# Altium PCB Orchid-Lamp.PcbDoc
Units mm, origin at the board's own origin, x right, y up, seen from the top; angles counter-clockwise.
Board outline 43.8 x 35.3 mm, 2 copper layers (Top Layer, Bottom Layer); 17 components, 20 nets, 100 pads, 0 vias.
Unrouted connection lines stored in the file: 5.
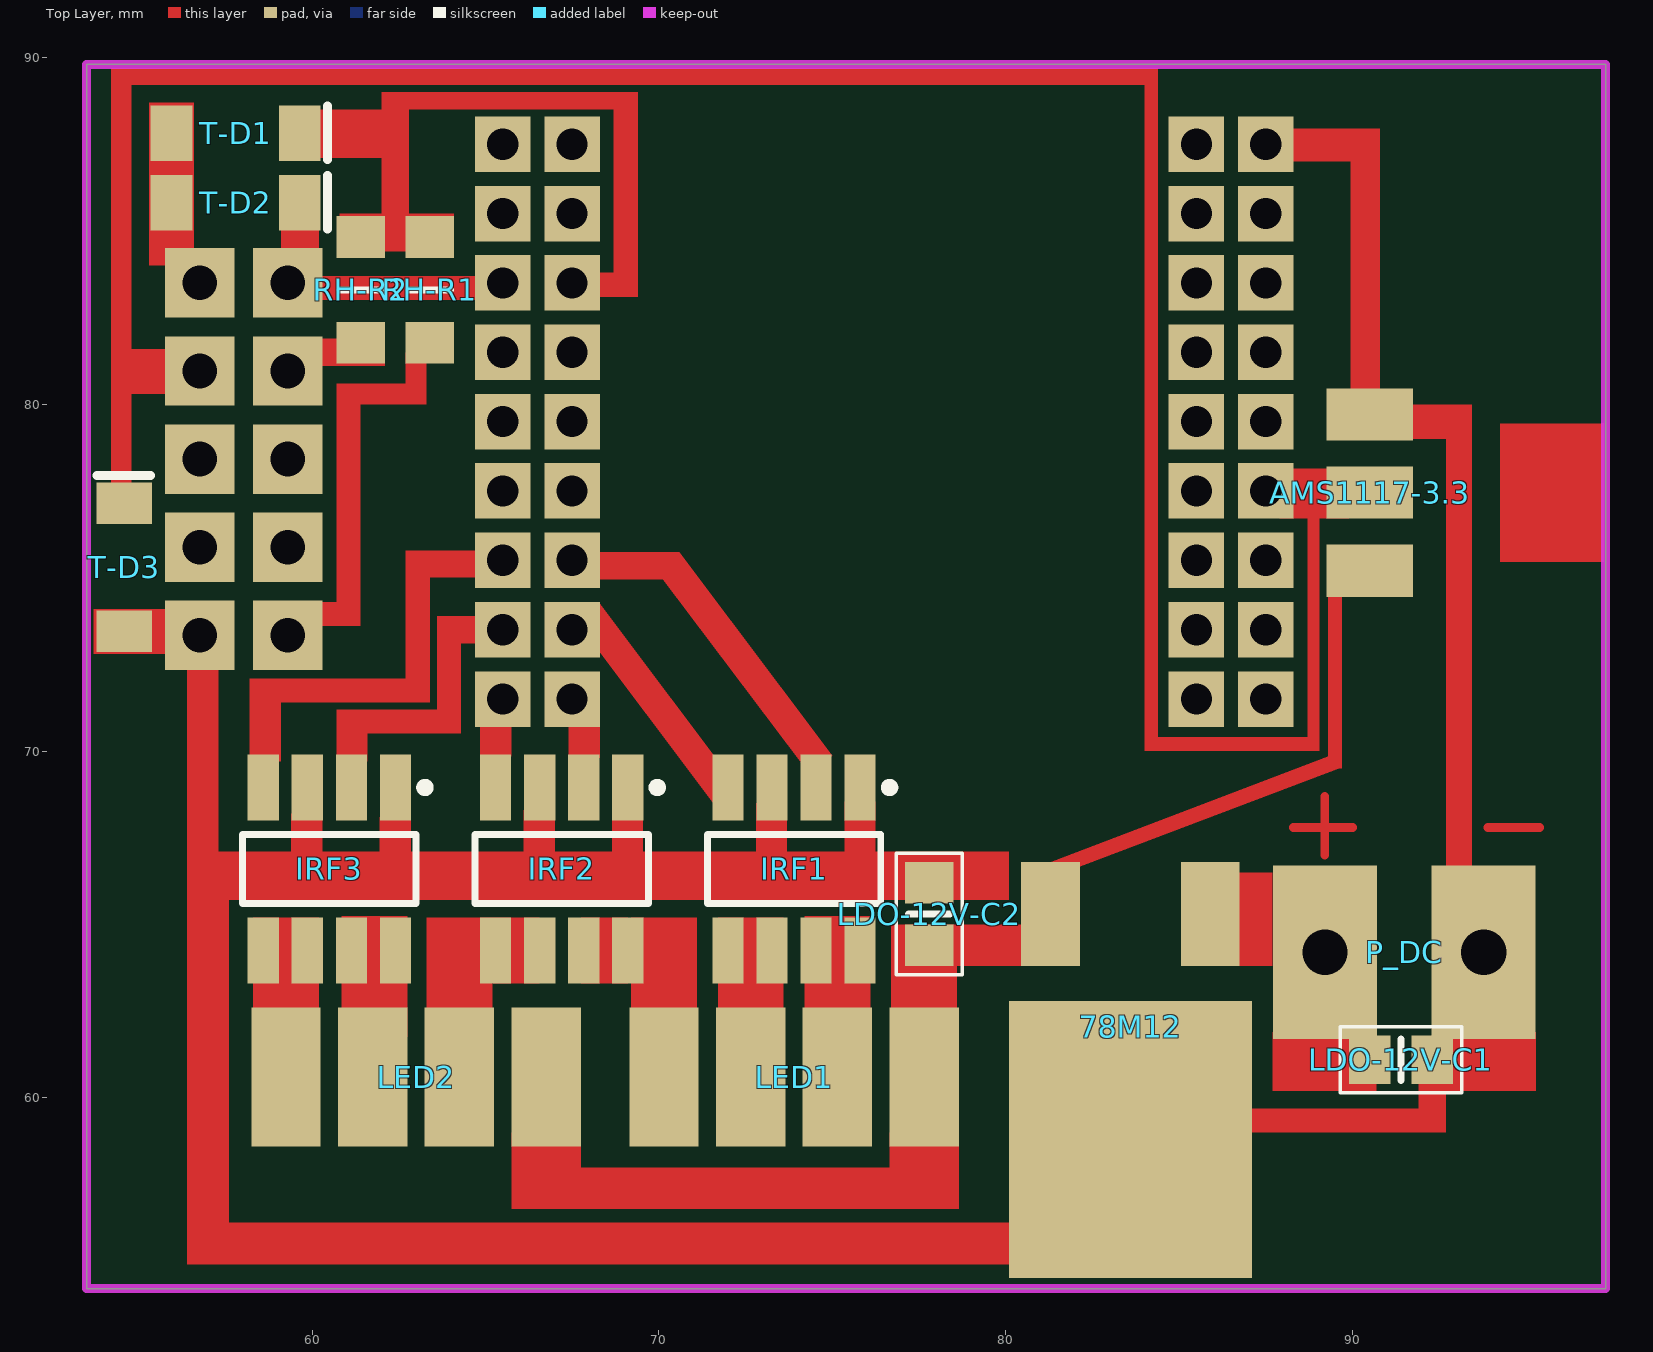
[diagram p0: Top Layer view]
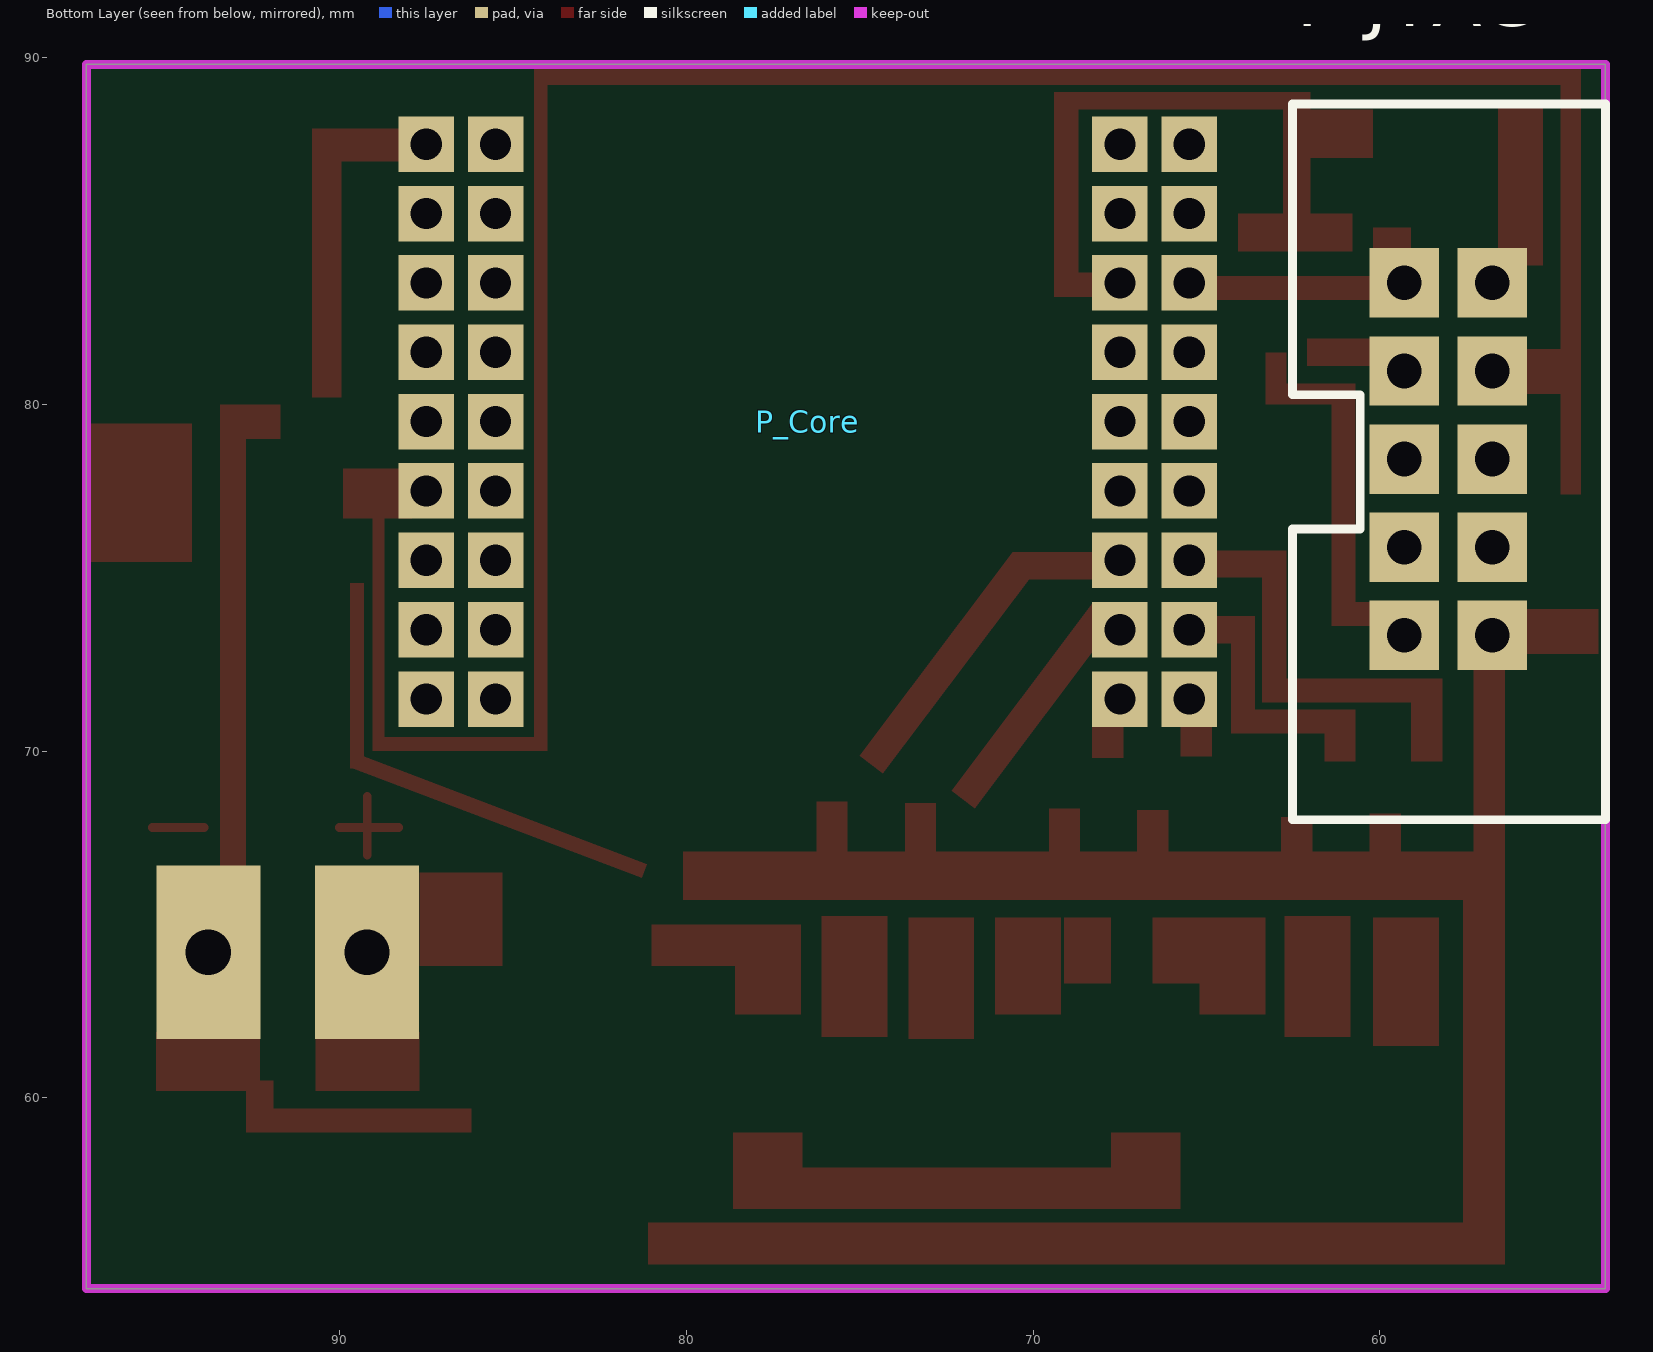
[diagram p1: Bottom Layer view, seen from below]

## Layer stack, top to bottom
Top Solder: solder mask 0.0102, Solder Resist, Dk 3.5
Top Layer: signal copper 0.0356
Dielectric 1: dielectric 0.32, FR-4, Dk 4.8
Bottom Layer: signal copper 0.0356
Bottom Solder: solder mask 0.0102, Solder Resist, Dk 3.5

## Board outline
53.5,54.5 97.3,54.5 97.3,89.8 53.5,89.8

## Design rules (kind name [scope] priority, off if disabled: settings)
Clearance [All] p1: gap=0.254
PolygonConnect [All] p1: connectstyle=Relief reliefconductorwidth=0.254 reliefentries=4 polygonreliefangle="90 Angle" airgapwidth=0.254
RoutingVias [All] p1: holewidth=0.711 width=1.27 viastyle="Through Hole" minholewidth=0.711 minwidth=1.27 maxholewidth=0.711 maxwidth=1.27
SolderMaskExpansion [All] p1: expansion=0.102
UnpouredPolygon [All] p1: allowunpoured=FALSE
Width [All] p1: maxlimit=0.254 minlimit=0.254 preferedwidth=0.254
29 further rules are at their usual default settings.

## Classes and differential pairs
component class LED: IRF1 IRF2 IRF3 LED1 LED2
component class VR1: 78M12 LDO-12V-C1 LDO-12V-C2
component class Top: P-JTAG P_Core P_DC T-D1 T-D2
component class JTAG-to-SWD: RH-R1 RH-R2
component class VR2: AMS1117-3.3

## Components (designator, comment, footprint, x,y, rotation, side; value= is the part's Value field where it differs from the comment)
78M12 "LDO 12V" TO-252-AA 83.6,62.5 r180 top
AMS1117-3.3 "AMS1117" SOT-223-3 89.75,80.7 r270 top
IRF1 "IRF7301" SOIC-8 73.9,66.6 r270 top
IRF2 "IRF7301" SOIC-8 67.2,66.6 r270 top
IRF3 "IRF7301" SOIC-8 60.5,66.6 r270 top
LDO-12V-C1 "1uF" "C 0805 / 2012" 91.4,61.1 r180 top
LDO-12V-C2 "1uF" "C 0805 / 2012" 77.8,65.3 r270 top
LED1 "LED strip RGB" "LED STRIP RGB CONNECTOR" 73.9,60.6 r180 top
LED2 "LED strip RGB" "LED STRIP RGB CONNECTOR" 63,60.6 r180 top
P-JTAG "AVR Style" "HEADER 2X5 IDC-10S" 59.3,83.5 r180 bottom
P_Core "Core51822_2" Core51822 88.5,70.5 r180 bottom
P_DC "Power supply" "DC cable pad with holes" 91.5,64.2 r0 top
RH-R1 "430R" "R 0805 / 2012 wide" 63.4,83.3 r270 top
RH-R2 "430R" "R 0805 / 2012 wide" 61.4,83.3 r90 top
T-D1 "BZV55-B3V3" Minimelf 57.8,87.8 r180 top
T-D2 "BZV55-B3V3" Minimelf 57.8,85.8 r180 top
T-D3 "BZV55-B3V3" Minimelf 54.6,75.3 r270 top

## Footprints (in the part's own frame and the unit in brackets; to place one, negate y for a bottom-side part, rotate by r counter-clockwise, add the part's x,y. Pads: shape width x height; smd on the part's side, far side on the other; paste and mask are expansions set on the pad)
"C 0805 / 2012" [mm] "Capacitor 0805 / 2012 (2.0 x 1.2 mm)"
  rect 1.2x1.4 smd: 1(-0.9,0) 2(0.9,0)
  silkscreen extent -1.75,-0.95 1.75,0.95, body extent -1,-0.62 1,0.62, height 0.78
Core51822 [mm]
  rect 1.6x1.6 hole 0.9: 1(1,17) 2(3,17) 3(1,15) 4(3,15) 5(1,13) 6(3,13) 7(1,11) 8(3,11) 9(1,9) 10(3,9) 11(1,7) 12(3,7) 13(1,5) 14(3,5) 15(1,3) 16(3,3) 17(1,1) 18(3,1) 19(21,17) 20(23,17) 21(21,15) 22(23,15) 23(21,13) 24(23,13) 25(21,11) 26(23,11) 27(21,9) 28(23,9) 29(21,7) 30(23,7) 31(21,5) 32(23,5) 33(21,3) 34(23,3) 35(21,1) 36(23,1)
"DC cable pad with holes" [mm]
  rect 3x5 hole 1.3: 1(-2.286,0) 2(2.286,0)
"HEADER 2X5 IDC-10S" [mm]
  rect 2x2 hole 1: 1(0,0) 2(2.54,0) 3(0,-2.54) 4(2.54,-2.54) 5(0,-5.08) 6(2.54,-5.08) 7(0,-7.62) 8(2.54,-7.62) 9(0,-10.16) 10(2.54,-10.16)
  silkscreen extent -3.22,-15.48 5.8,5.16, body extent -3.23,-15.46 5.87,5.14, height 9.3
"LED STRIP RGB CONNECTOR" [mm]
  rect 2x4 smd: 1(-3.75,0) 2(-1.25,0) 3(1.25,0) 4(3.75,0)
Minimelf [mm]
  rect 1.2x1.6 smd: 1(-1.85,-0.013) 2(1.85,-0.013)
  silkscreen extent -2.65,-0.8 -2.65,0.75, body extent -1.85,-0.8 1.85,0.77, height 1.6
"R 0805 / 2012 wide" [mm] "Resistor 0805 / 2012 (2.0 x 1.2 mm)"
  rect 1.2x1.4 smd: 1(-1.524,0) 2(1.524,0)
  silkscreen extent 0,-0.6 0,0.6, body extent -1,-0.62 1,0.62, height 0.45
SOIC-8 [mm]
  rect 1.9x0.9 smd: 1(-2.35,1.905) 2(-2.35,0.635) 3(-2.35,-0.635) 4(-2.35,-1.905) 5(2.35,-1.905) 6(2.35,-0.635) 7(2.35,0.635) 8(2.35,1.905)
  silkscreen extent -2.47,-2.5 1,2.88, body extent -3,-2.45 3,2.45, height 1.75
SOT-223-3 [mm]
  rect 1.5x2.5 smd: 1(1,0.75) 2(3.25,0.75) 3(5.5,0.75)
  Top Layer region: 1.25,4.5 5.25,4.5 5.25,7.5 1.25,7.5
  body extent -0.1,-0.22 6.6,7.08, height 1.8
TO-252-AA [mm]
  rect 1.7x3 smd: 1(-2.3,-2.8) 3(2.3,-2.8)
  rect 7x8 smd: 4(0,3.7)
  body extent -3.35,-3.7 3.33,6.7, height 2.4

## Part data
78M12: library part 78M12
AMS1117-3.3: "LDO 3.3V/5V/12V"
LDO-12V-C1 LDO-12V-C2: library part Capacitor
P-JTAG: library part "Header JTAG AVR"
RH-R1 RH-R2: library part Resistor
T-D1 T-D2 T-D3: library part "Zener Diode"

## Nets (pads, with @x,y where several pads share a name; then routed paths per layer and width w, separated by ;. In a path a pad name is that pad's centre, name@x,y a point inside that pad or via, vN(x,y) a via of type N, cw(c..) or ccw(c..) an arc to the next point about the centre after c; other vN are vias at no path point)
3.3V: AMS1117-3.3.2 P-JTAG.4 P-JTAG.7 P_Core.11 T-D3.1
12V: 78M12.3 AMS1117-3.3.3 LDO-12V-C2.2 LED1.1 LED2.1
GND: 78M12.4 AMS1117-3.3.1 IRF1.1 IRF1.3 IRF2.1 IRF2.3 IRF3.1 IRF3.3 LDO-12V-C1.1 LDO-12V-C2.1 P-JTAG.2 P-JTAG.10 P_Core.1 P_DC.2 T-D1.2 T-D2.2 T-D3.2
Net78M12_1: 78M12.1 LDO-12V-C1.2 P_DC.1
NetIRF1_2: IRF1.2 P_Core.31
NetIRF1_4: IRF1.4 P_Core.33
NetIRF1_5: IRF1.5 IRF1.6 LED1.3
NetIRF1_7: IRF1.7 IRF1.8 LED1.2
NetIRF2_2: IRF2.2 P_Core.35
NetIRF2_4: IRF2.4 P_Core.36
NetIRF2_5: IRF2.5 IRF2.6 LED2.2
NetIRF2_7: IRF2.7 IRF2.8 LED1.4
NetIRF3_2: IRF3.2 P_Core.34
NetIRF3_4: IRF3.4 P_Core.32
NetIRF3_5: IRF3.5 IRF3.6 LED2.4
NetIRF3_7: IRF3.7 IRF3.8 LED2.3
SWDCLK: P-JTAG.1 P_Core.24 T-D2.1
SWDIO: P_Core.23 RH-R1.1 RH-R2.2 T-D1.1
TDI: P-JTAG.9 RH-R1.2
TDO: P-JTAG.3 RH-R2.1
pads on no net: P-JTAG.5 P-JTAG.6 P-JTAG.8 P_Core.2 P_Core.3 P_Core.4 P_Core.5 P_Core.6 P_Core.7 P_Core.8 P_Core.9 P_Core.10 P_Core.12 P_Core.13 P_Core.14 P_Core.15 P_Core.16 P_Core.17 P_Core.18 P_Core.19 P_Core.20 P_Core.21 P_Core.22 P_Core.25 P_Core.26 P_Core.27 P_Core.28 P_Core.29 P_Core.30
copper on no net: | length 4.9
  Top Layer w0.254: 88.3,67.8 90,67.8 ; 89.2,67 89.2,68.7 ; 93.9,67.8 95.4,67.8

## Keep-outs
Keep-Out Layer:
  the board outline again, w0.254

## Other copper
Top Layer:
  rectangle net GND: 53.7,72.8 56.1,74.1
  rectangle net 3.3V: 54.2,77.4 54.8,89.2
  rectangle net 3.3V: 54.5,80.3 55.9,81.6
  rectangle net GND: 55.3,84 56.6,88.7
  rectangle net SWDIO: 60.2,87.1 62.3,88.5
  rectangle net GND: 55.8,84.3 56.5,85.3
  rectangle net SWDCLK: 59.1,84.3 60.2,85.1
  rectangle net TDI: 61.3,80 62.7,80.6
  rectangle net TDI: 60.7,74.3 61.4,80.6
  rectangle net TDI: 60.1,73.6 61.4,74.3
  rectangle net TDI: 62.7,80 63.3,81.5
  rectangle net TDO: 60.1,81.1 62.1,81.9
  rectangle net GND: 92.3,60.2 95.3,61.9
  rectangle net Net78M12_1: 87.7,60.2 90.7,61.9
  rectangle net GND: 86.2,59 91.9,59.7
  rectangle net GND: 91.9,59 92.7,60.5
  rectangle net SWDIO: 60.8,84.4 64.1,85.5
  rectangle net SWDIO: 62,85.3 62.8,89
  rectangle net NetIRF3_4: 62.7,72.1 63.4,75
  rectangle net NetIRF3_4: 59.1,71.4 63.4,72.1
  rectangle net NetIRF3_4: 58.2,69.7 59.1,72.1
  rectangle net NetIRF3_2: 60.7,69.7 61.6,70.5
  rectangle net NetIRF3_2: 60.7,70.5 63.6,71.2
  rectangle net NetIRF3_2: 63.6,70.5 64.3,73.1
  rectangle net GND: 86.95,87 90.1,87.95
  rectangle net NetIRF2_7: 67.75,63.3 69.115,65.2
  rectangle net GND: 75.35,66.95 76.25,68.55
  rectangle net GND: 72.8,66.9 73.7,68.5
  rectangle net GND: 68.65,66.75 69.55,68.35
  rectangle net NetIRF1_7: 74.2,61.75 76.1,65.25
  region net NetIRF2_7: 71.1,65.2 69.2,65.2 69.2,62.4 71.1,62.4
  rectangle net NetIRF2_5: 65.2,63.3 66.565,65.2
  rectangle net NetIRF2_5: 63.3,62.4 65.2,65.2
  rectangle net GND: 56.4,66.8 57.3,72.5
  rectangle net 3.3V: 54.2,89.2 84.4,89.7
  rectangle net TDI: 68.7,83.8 69.4,88.6
  rectangle net TDI: 62.5,88.5 69.4,89
  rectangle net SWDIO: 67.6,83.1 69.4,83.8
  rectangle net GND: 59.4,66.8 60.3,68.2
  rectangle net GND: 61.95,66.9 62.85,68.1
  rectangle net GND: 66.1,66.7 67,68.3
  rectangle net 12V: 76.65,57.4 78.65,59
  rectangle net 12V: 65.75,56.8 78.65,58
  rectangle net GND: 56.4,65.7 80.1,67.1
  rectangle net NetIRF1_5: 71.7,61.7 73.6,65.2
  rectangle net NetIRF3_7: 60.85,61.75 62.75,65.25
  rectangle net NetIRF3_5: 58.3,61.5 60.2,65.2
  rectangle net SWDCLK: 59.9,83 65.3,83.7
  rectangle net 12V: 89.3,69.5 89.7,74.85
  rectangle net 3.3V: 87.9,76.7 89.9,78.15
  rectangle net GND: 89.95,80.2 90.8,87.95
  rectangle net GND: 92.7,66.4 93.45,80
  rectangle net GND: 91.7,79 92.9,80
  rectangle net 12V: 65.75,57.4 67.75,59
  rectangle net NetIRF2_2: 67.4,69.8 68.3,71.15
  rectangle net NetIRF2_4: 64.85,69.85 65.75,70.95
  region net NetIRF1_4: 71.683,68.348 72.364,68.861 68.302,74.252 67.621,73.738
  region net NetIRF1_2: 74.333,69.348 75.014,69.861 70.585,75.74 69.903,75.226
  rectangle net NetIRF1_2: 67.75,74.95 70.585,75.74
  region net NetIRF3_4: 65.4,75.79 62.7,75.79 62.7,75 65.4,75
  region net NetIRF3_2: 66.05,73.89 63.6,73.89 63.6,73.1 66.05,73.1
  rectangle net 3.3V: 88.7,70 89.05,76.7
  rectangle net 3.3V: 84.1,70 88.7,70.4
  rectangle net 3.3V: 84,70 84.4,89.7
  rectangle net 12V: 76.7,63.8 81,65
  rectangle net 12V: 76.7,62.4 78.6,63.8
  region net 12V: 81.131,66.746 81.285,66.339 89.669,69.519 89.514,69.926
  rectangle net GND: 56.4,55.2 81.1,56.4
  rectangle net GND: 56.4,56 57.6,65.7
  rectangle net Net78M12_1: 85.3,63.8 87.7,66.5